# EAGLE board Artois Back PCB (EAGLE 9.5.2)
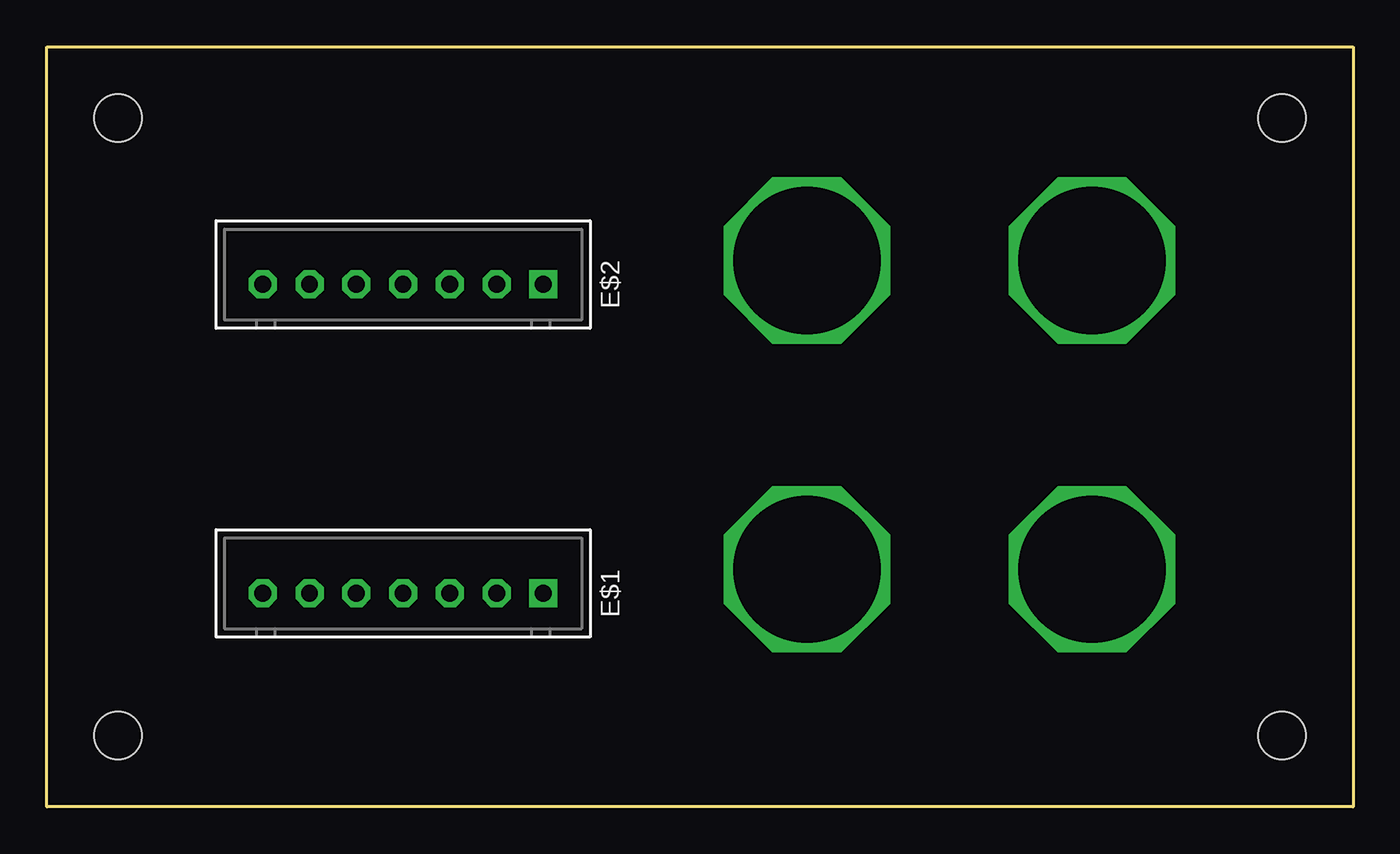
[diagram p0: board, top side]

Size 69.85 x 40.64 mm. Coordinates in mm from the lower left corner, seen from the top.
Outline: 0,0 0,40.64 69.85,40.64 69.85,0 0,0
Copper layers (1*16): Top 0.035mm / dielectric 1.5mm / Bottom 0.035mm
Design rules "default": minimum track width 6mil, minimum drill 0.35mm, track to track 6mil, track to pad 6mil, pad to pad 6mil, via to via 6mil, smd to smd 6mil, copper to edge 40mil, drill to drill 6mil, minimum pad ring 10mil, minimum via ring 8mil, stop-mask expansion 4mil, vias tented up to drill 0mil, thermal gap 10mil
Holes 2.54 mm at 3.81,3.81 3.81,36.83 66.04,3.81 66.04,36.83

## Footprints (pad centres in the part's own frame; a part is rotated, then mirrored left to right if it is on the bottom)
B7B-XH-A = drill 0.9 pad 1.5 square: 1 7.5,0 | drill 0.9 pad 1.5 octagon: 2 5,0; 3 2.5,0; 4 0,0; 5 -2.5,0; 6 -5,0; 7 -7.5,0

## Placement (x,y rotation side)
E$1  [B7B-XH-A]  19.05,11.43 0 top
E$2  [B7B-XH-A]  19.05,27.94 0 top

## Library data of the parts
E$1 E$2 = con-JST XH

## Tracks (layer width: path | path; a pad name or v marks a point on that pad's centre or on a via)
S$1  (via drill 7.87)
  other vias: 40.64,29.21
S$2  (via drill 7.87)
  other vias: 55.88,29.21
S$3  (via drill 7.87)
  other vias: 40.64,12.7
S$4  (via drill 7.87)
  other vias: 55.88,12.7